# EAGLE board stir_plate (EAGLE 7.6.0)

Size 166.37 x 88.9 mm. Coordinates in mm from the lower left corner, seen from the top.
Outline: 0,88.9 0,0 166.37,0 166.37,88.9 0,88.9
Copper layers (1*16): Top 0.035mm / dielectric 1.5mm / Bottom 0.035mm
Design rules "default": minimum track width 10mil, minimum drill 24mil, track to track 8mil, track to pad 8mil, pad to pad 8mil, via to via 8mil, smd to smd 8mil, copper to edge 40mil, drill to drill 8mil, minimum pad ring 10mil, minimum via ring 8mil, stop-mask expansion 4mil, vias tented up to drill 0mil, thermal gap 10mil
Net classes: 0 default: clearance 0.205 mm

## Footprints (pad centres in the part's own frame; a part is rotated, then mirrored left to right if it is on the bottom)
TUXGR_16X2_R2 = drill 1 pad 1.676: 1 -32,15.5; 2 -29.46,15.5; 3 -26.92,15.5; 4 -24.38,15.5; 5 -21.84,15.5; 6 -19.3,15.5; 7 -16.76,15.5; 8 -14.22,15.5; 9 -11.68,15.5; 10 -9.14,15.5; 11 -6.6,15.5; 12 -4.06,15.5; 13 -1.52,15.5; 14 1.02,15.5; 15 3.56,15.5; 16 6.1,15.5 | hole 2.5: -37.5,-15.5; 37.5,-15.5; -37.5,15.5; 37.5,15.5
JP2 = drill 0.914 long: 1 -2.54,0; 2 0,0; 3 2.54,0
PC16S = drill 1.2 long: 1A -5,6.5; 1E 5,6.5; 1S 0,6.5
0204/5 = drill 0.813 octagon: 1 -2.54,0; 2 2.54,0
TO220-ADJ = drill 1 pad 1.88 square: ADJ -2.54,0 | drill 1 pad 1.88: IN 2.54,0; OUT 0,0
ARDUINO_PRO_MINI = drill 1.016 pad 1.88: 1 -7.62,12.7; 2 -7.62,10.16; 3 -7.62,7.62; 4 -7.62,5.08; 5 -7.62,2.54; 6 -7.62,0; 7 -7.62,-2.54; 8 -7.62,-5.08; 9 -7.62,-7.62; 10 -7.62,-10.16; 11 -7.62,-12.7; 12 -7.62,-15.24; 13 7.62,-15.24; 14 7.62,-12.7; 15 7.62,-10.16; 16 7.62,-7.62; 17 7.62,-5.08; 18 7.62,-2.54; 19 7.62,0; 20 7.62,2.54; 21 7.62,5.08; 22 7.62,7.62; 23 7.62,10.16; 24 7.62,12.7; A4 4.763,1.429; A5 4.763,3.969; A6 4.763,-9.049; A7 4.763,-6.509; BLK -6.35,15.24; GND -3.81,15.24; GRN 6.35,15.24; RXI 1.27,15.24; TXO 3.81,15.24; VCC -1.27,15.24
DIL18 = drill 0.813 long: 1 -10.16,-3.81; 2 -7.62,-3.81; 3 -5.08,-3.81; 4 -2.54,-3.81; 5 0,-3.81; 6 2.54,-3.81; 7 5.08,-3.81; 8 7.62,-3.81; 9 10.16,-3.81; 10 10.16,3.81; 11 7.62,3.81; 12 5.08,3.81; 13 2.54,3.81; 14 0,3.81; 15 -2.54,3.81; 16 -5.08,3.81; 17 -7.62,3.81; 18 -10.16,3.81

## Placement (x,y rotation side)
DIS1  TUXGR_16X2_R2  [TUXGR_16X2_R2]  97.79,60.96 0 top
JP1  [JP2]  87.63,36.83 0 top
R1  PC16S  [PC16S]  73.66,24.13 0 top
R2  [0204/5]  97.79,40.64 0 top
R3  PC16S  [PC16S]  146.05,44.45 0 top
U1  V_REG_317SINK  [TO220-ADJ]  106.68,15.24 0 top
U$1  ARDUINO_PRO_MINI  [ARDUINO_PRO_MINI]  129.54,20.32 0 top
ULN1  [DIL18]  106.68,27.94 0 top

## Library data of the parts
DIS1 = display-lcd; OC_FARNELL: unknown; OC_NEWARK: unknown
JP1 = jumper
R1 R3 = piher; OC_FARNELL: 4452940; OC_NEWARK: unknown
R2 = resistor
U1 ULN1 = SparkFun-PowerIC
U$1 = SparkFun-Boards

## Nets
GND: DIS1.1 DIS1.5 DIS1.16 R1.1E R3.1E U$1.4 ULN1.8
N$1: U$1.13
N$2: JP1.1 ULN1.18
N$3: DIS1.3 R3.1S
N$4: DIS1.11 U$1.8
N$5: R2.1 U$1.14
N$6: JP1.3 R2.2
N$7: DIS1.12 U$1.7
N$8: DIS1.2 DIS1.15 R1.1A R3.1A U1.OUT U$1.21
N$9: DIS1.13 U$1.6
N$10: DIS1.14 U$1.5
N$11: DIS1.4 U$1.15
N$12: R1.1S U$1.17
N$13: DIS1.6 U$1.16
VCC: JP1.2 U1.IN

## Tracks (layer width: path | path; a pad name or v marks a point on that pad's centre or on a via)
GND  (6 unrouted)
N$2  (1 unrouted)
N$3  (1 unrouted)
N$4  (1 unrouted)
N$5  (1 unrouted)
N$6  (1 unrouted)
N$7  (1 unrouted)
N$8  (5 unrouted)
N$9  (1 unrouted)
N$10  (1 unrouted)
N$11  (1 unrouted)
N$12  (1 unrouted)
N$13  (1 unrouted)
VCC  (1 unrouted)